# EAGLE board NeoJointV2A-120 (EAGLE 6.6.0)
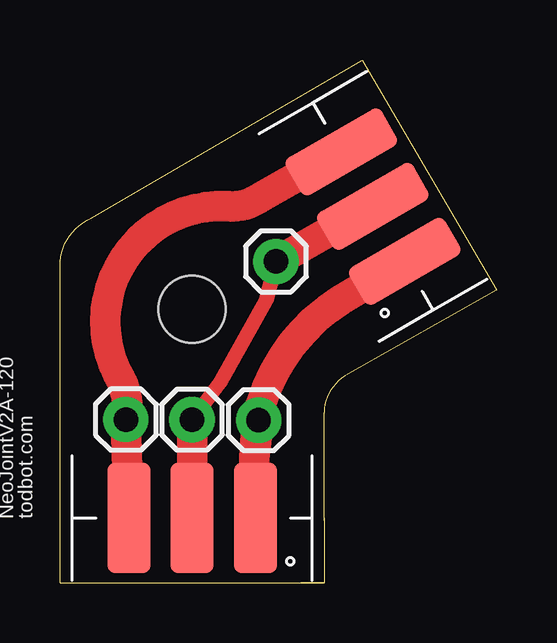
[diagram p0: board, top side]

Size 18.2 x 21.8 mm. Coordinates in mm from the lower left corner, seen from the top.
Outline: 10.03,0 0,0 0,13.2 arc-67 1.3,15.2 12.6,21.8 18.2,12.2 12,8.7 arc60 11,7.1 11,2.6
Outline: 10.03,0 11,0
Outline: 11,0 10.03,0
Outline: 11,2.7 11,2.6
Outline: 11,2.6 11,0
Copper layers (1*16): Top 0.0356mm / dielectric 1.5011mm / Bottom 0.0356mm
Design rules "LaenPCBOrder-tod": minimum track width 10mil, minimum drill 13mil, track to track 6mil, track to pad 8mil, pad to pad 8mil, via to via 8mil, smd to smd 6mil, copper to edge 15mil, drill to drill 8mil, minimum pad ring 7mil, minimum via ring 7mil, stop-mask expansion 4mil, vias tented up to drill 25mil, thermal gap 10mil
Holes 2.8 mm at 5.5,11.4

## Footprints (pad centres in the part's own frame; a part is rotated, then mirrored left to right if it is on the bottom)
1X01 = drill 1.016 pad 1.88: 1 0,0
LEDSTRIP-3P = smd 4.6 x 1.8: A 0,-2.65; B 0,0; C 0,2.63

## Placement (x,y rotation side)
JP1  [1X01]  8.28,6.78 0 top
JP2  [1X01]  9,13.4 0 top
JP3  [1X01]  2.75,6.81 0 top
JP4  [1X01]  5.5,6.8 0 top
U$1  LED_STRIP_3P  [LEDSTRIP-3P]  5.5,2.7 90 top
U$2  LED_STRIP_3P  [LEDSTRIP-3P]  13.04,15.69 30 top

## Library data of the parts
JP1-JP4 = SparkFun-Connectors
U$1 U$2 = todstuff

## Nets
A: JP1.1 U$1.A U$2.A
B: JP2.1 JP4.1 U$1.B U$2.B
C: JP3.1 U$1.C U$2.C

## Tracks (layer width: path | path; a pad name or v marks a point on that pad's centre or on a via)
A
  Top 1.27: U$2.A 11.7,11.8 arc45 8.2,6.8 8.1,5.2 | U$1.A 8.1,5.2 | JP1.1 8.1,5.2
B
  Top 0.61: JP4.1 6.7,8.4 8.6,11.8 JP2.1
  Top 1.27: U$1.B JP4.1 | JP2.1 U$2.B
C
  Top 1.27: U$1.C JP3.1 | JP3.1 arc14 2.6,7 | U$2.C 8.4,16.1 arc-41 7,15.7 arc120 2.4,8.7 arc-45 JP3.1

## Text on the board
tPlace: NeoJointV2A-120 | todbot.com